# Altium PCB TPS40200BuckDesign.PcbDoc (part 1 of 2)
Units mil, origin at the board's own origin, x right, y up, seen from the top; angles counter-clockwise.
Board outline 3109.96 x 2273.62 mil, 2 copper layers (Top Layer, Bottom Layer), stack 62 mil thick; 37 components, 13 nets, 69 pads, 29 vias.
Unrouted connection lines stored in the file: 1.
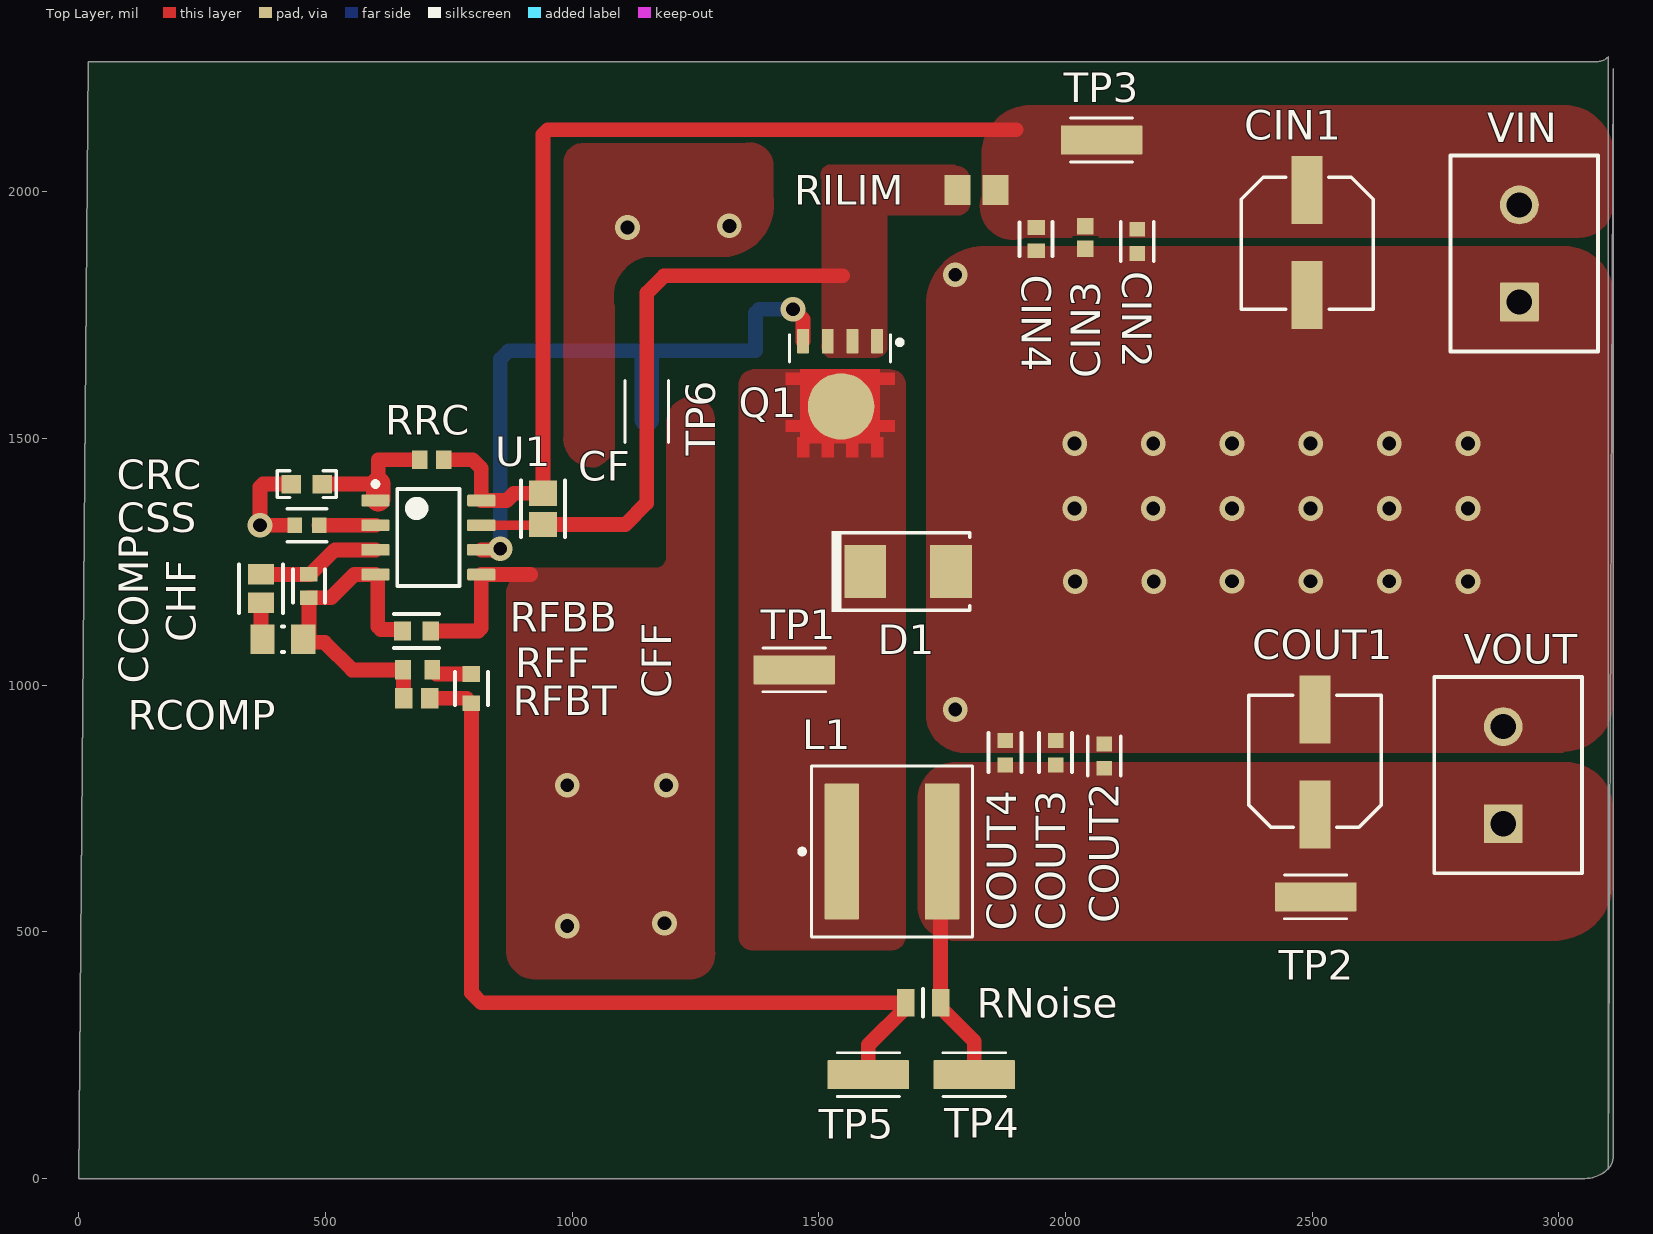
[diagram p0: Top Layer view]
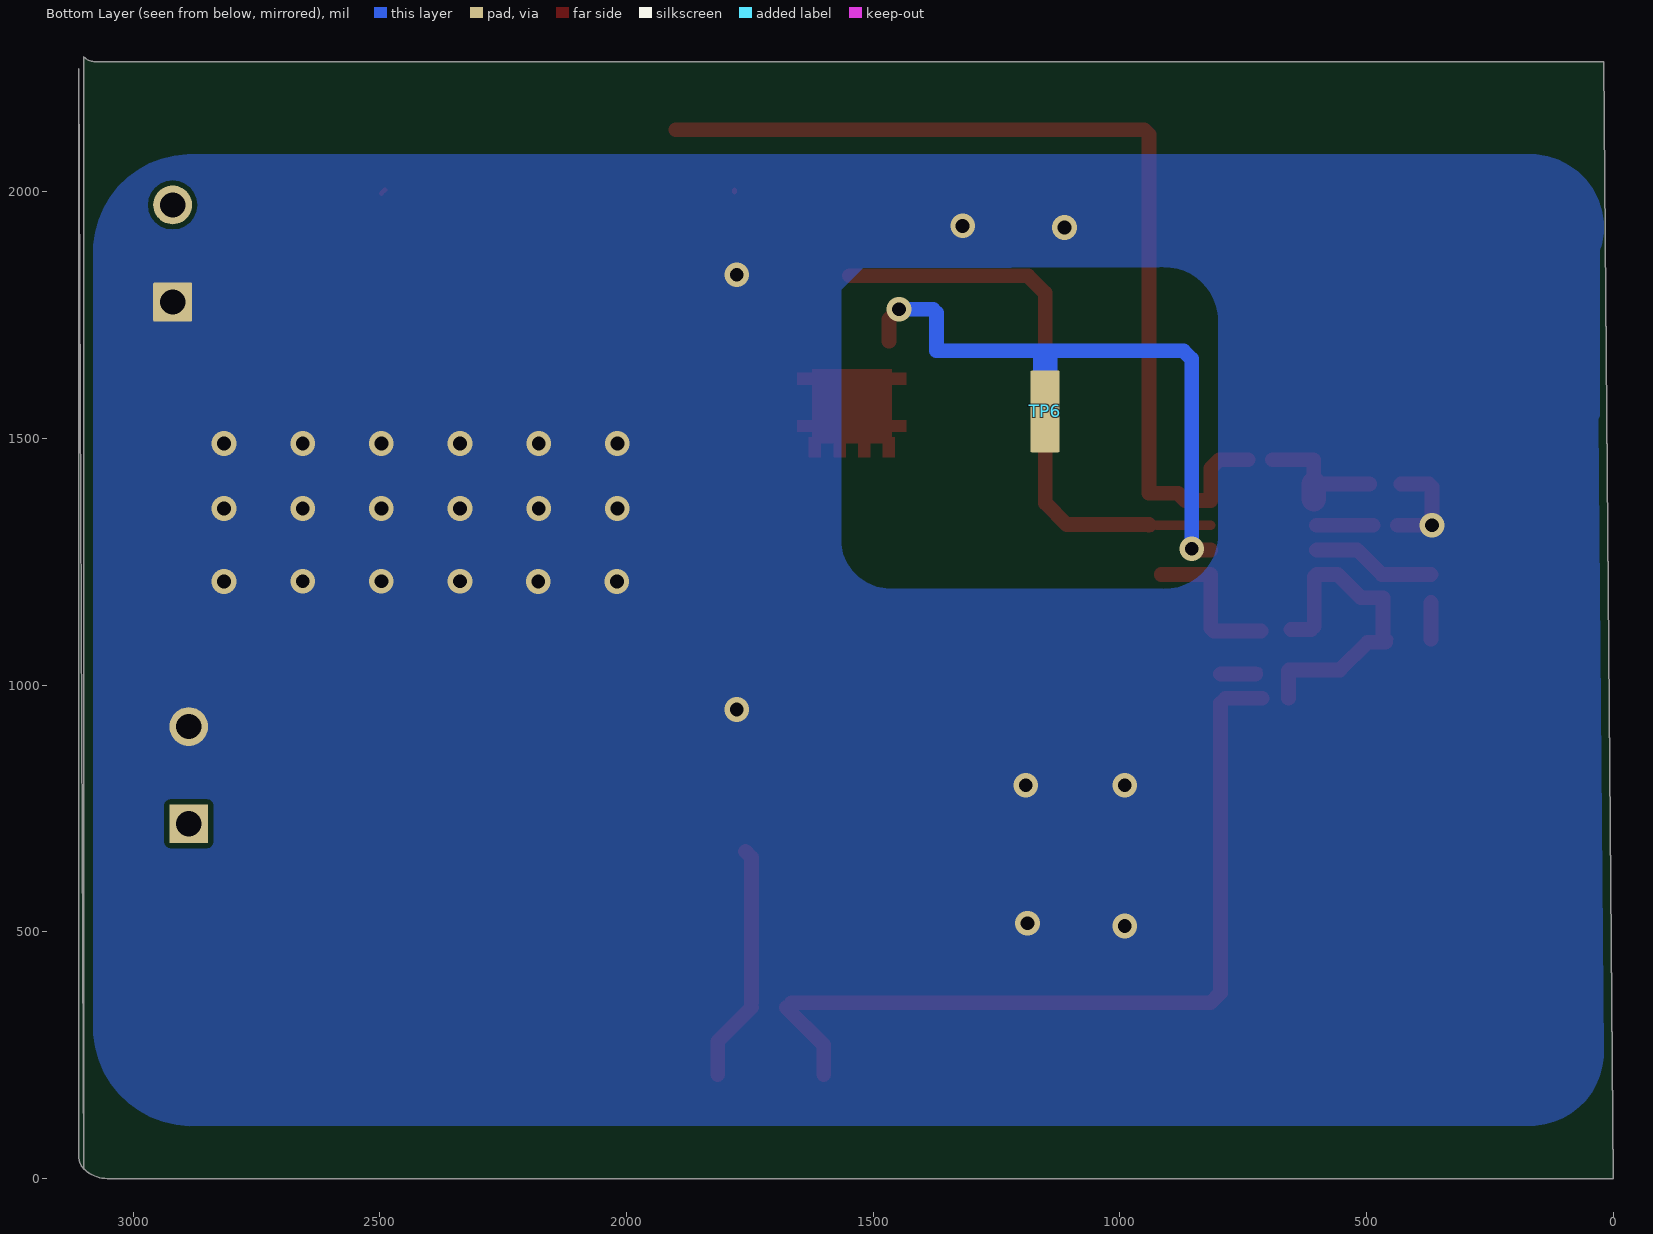
[diagram p1: Bottom Layer view, seen from below]

## Layer stack, top to bottom
Top Solder: solder mask 0.4, Solder Resist, Dk 3.5
Top Layer: signal copper 1.4
Dielectric1: core 59.2, FR-4 High Tg, Dk 4.8
Bottom Layer: signal copper 1.4
Bottom Solder: solder mask 0.4, Solder Resist, Dk 3.5

## Board outline
19.25,2263.78 3076.63,2263.78 ccw(c3076.63,2297.38) 3100.39,2273.62 3100.39,19.68 3110.24,2249.86 3110.24,43.45 cw(c3076.63,43.45) 3100.39,19.68 cw(c3052.87,67.21) 3052.87,0 0.27,0

## Design rules (kind name [scope] priority, off if disabled: settings)
AcuteAngle [All] p1: minimum=4.50000000000000E+0001 checktracksonly=FALSE
AssemblyTestPointUsage [All] p1: valid=2
BoardOutlineClearance BoardOutlineClearance_MountingHoles [OnCopper and InComponentClass('Mounting Holes')] p1: gap=39.37 ignorepadtopadclearanceinfootprint=FALSE
BoardOutlineClearance BoardOutlineClearance_Poly [OnCopper and IsPoly] p2: gap=25 ignorepadtopadclearanceinfootprint=FALSE
BoardOutlineClearance [OnCopper and Not InComponentClass('Logo') and not InComponentClass('FiducialMark') and not InRegion(1000,500,4000,800) and not InPoly] p3: gap=40 ignorepadtopadclearanceinfootprint=FALSE
Clearance Clearance_Keepouts [((IsTrack Or IsArc) And Not InPoly) And IsFree and IsKeepOut vs ((IsTrack Or IsArc) And Not InPoly) And IsFree and IsKeepOut] p1: gap=0 ignorepadtopadclearanceinfootprint=FALSE
Clearance Clearance_Poly [InPolygon] p2: gap=10 ignorepadtopadclearanceinfootprint=TRUE
Clearance Clearance_FiducialMark [IsKeepOut and InComponentClass('FiducialMark') vs IsPad and InComponentClass('FiducialMark')] p3: gap=0 ignorepadtopadclearanceinfootprint=FALSE
Clearance [All] p4: gap=7.87 ignorepadtopadclearanceinfootprint=TRUE
ComponentClearance ComponentClearance_MountingHoles_FiducialMarks [InComponentClass('Mounting Holes') vs InComponentClass('FiducialMark')] p1: gap=50 collisioncheckmode=3 verticalgap=10 showdistances=FALSE
ComponentClearance ComponentClearance_Shunt [InComponentClass('Header') vs InComponentClass('Shunt')] p2: gap=0 collisioncheckmode=3 verticalgap=0 showdistances=FALSE
ComponentClearance ComponentClearance_Logo [InComponentClass('Logo')] p3: gap=30 collisioncheckmode=3 verticalgap=10 showdistances=FALSE
ComponentClearance ComponentClearance_ScrewToNut [(HasFootprint('NY PMS 440 0025 PH')) vs (HasFootprint('Keystone_1902C'))] p4: gap=5 collisioncheckmode=3 verticalgap=10 showdistances=FALSE
ComponentClearance ComponentClearance_MountingHoles [InComponentClass('Mounting Holes')] p5: gap=100 collisioncheckmode=3 verticalgap=100000 showdistances=FALSE
ComponentClearance ComponentClearance_SmallPassives [HasFootprint('0201*') or HasFootprint('0402*') or HasFootprint('0508') or HasFootprint('0603*') or HasFootprint('0612') or HasFootprint('0805*') or HasFootprint('0815*') or HasFootprint('0830*') or HasFootprint('1206*') or HasFootprint('1210*') or HasFootprint('1808*') or HasFootprint('1812*') or HasFootprint('1825*') or HasFootprint('2010*') or HasFootprint('2220*') or HasFootprint('2225*') or HasFootprint('2512*') or HasFootprint('2728*') or HasFootprint('3518*') vs HasFootprint('0201*') or HasFootprint('0402*') or HasFootprint('0508') or HasFootprint('0603*') or HasFootprint('0612') or HasFootprint('0805*') or HasFootprint('0815*') or HasFootprint('0830*') or HasFootprint('1206*') or HasFootprint('1210*') or HasFootprint('1808*') or HasFootprint('1812*') or HasFootprint('1825*') or HasFootprint('2010*') or HasFootprint('2220*') or HasFootprint('2225*') or HasFootprint('2512*') or HasFootprint('2728*') or HasFootprint('3518*')] p6: gap=14.96 collisioncheckmode=3 verticalgap=10 showdistances=FALSE
ComponentClearance ComponentClearance_THtoSMT [IsThruComponent vs IsSMTComponent] p7: gap=30 collisioncheckmode=3 verticalgap=30 showdistances=FALSE
ComponentClearance ComponentClearance_THtoTH [IsThruComponent vs IsThruComponent] p8: gap=20 collisioncheckmode=3 verticalgap=30 showdistances=FALSE
ComponentClearance [All] p9: gap=20 collisioncheckmode=3 verticalgap=10 showdistances=FALSE
DiffPairsRouting [All] p1: maxlimit=100 minlimit=10 mostfreqgap=10 toplayer_minwidth=15 toplayer_maxwidth=15 toplayer_prefwidth=15 bottomlayer_minwidth=15 bottomlayer_maxwidth=15 bottomlayer_prefwidth=15 maxuncoupledlength=1000
FabricationTestPointUsage TestPointUsage [All] p1: valid=2 allowmultiple=FALSE
FabricationTestpoint Testpoint [All] p1: side=3 testpointundercomponent=TRUE minsize=40 maxsize=100 preferedsize=60 minholesize=0 maxholesize=40 preferedholesize=32 testpointgrid=1 allowsidetop=TRUE allowsidebottom=TRUE usegrid=TRUE gridtolerance=0.01
FanoutControl Fanout_LCC [IsLCC] p1: bgadir=Out bgaviamode=Centered fanoutstyle=Auto fanoutdirection=Alternating viagrid=1 // Fanout_LCC (Default Rule)
FanoutControl Fanout_BGA [IsBGA] p2: bgadir=Out bgaviamode=Centered fanoutstyle=Auto fanoutdirection=Alternating viagrid=1 // Fanout_BGA (Default Rule)
FanoutControl Fanout_Default [All] p4: bgadir=Out bgaviamode=Centered fanoutstyle=Auto fanoutdirection=Alternating viagrid=1 // Fanout_Default (Default Rule)
FanoutControl Fanout_Small [(CompPinCount < 5)] p5: bgadir=Out bgaviamode=Centered fanoutstyle=Auto fanoutdirection=OutThenIn viagrid=1 // Fanout_Small (Default Rule)
HoleSize [All] p1: absolutevalues=TRUE maxlimit=251 minlimit=7.87 maxpercent=80.000 minpercent=20.000
MinimumAnnularRing MinimumAnnularRing_ThermalPadVias [IsVia and InAnyComponent] p1: minimumring=5.91
MinimumAnnularRing [All] p2: minimumring=7.87
MinimumSolderMaskSliver MinimumSolderMaskSliver_Logo [InComponentClass('Logo') vs InComponentClass('Logo')] p1: minsoldermaskwidth=0.7
MinimumSolderMaskSliver [All] p2: minsoldermaskwidth=3.94
PlaneConnect [All] p1: planeconnectstyle=Direct reliefexpansion=10 reliefentries=4 reliefconductorwidth=10 reliefairgap=10
PolygonConnect [All] p1: connectstyle=Direct reliefconductorwidth=10 reliefentries=4 polygonreliefangle="90 Angle" airgapwidth=10
RoutingVias ThermalPadVias [IsVia and InAnyComponent] p1: holewidth=7.87 width=19.68 viastyle="Through Hole" minholewidth=7.87 minwidth=19.68 maxholewidth=12.99 maxwidth=23.62
RoutingVias [All] p2: holewidth=16 width=34 viastyle="Through Hole" minholewidth=7.87 minwidth=24 maxholewidth=40 maxwidth=65
SilkToBoardRegionClearance [Not ((IsComment or IsDesignator) And (Hide <> 'False')) and not InRegion(1000,500,4000,800)] p1:
SilkToSilkClearance SilkToSilkClearance_Pb-FreeLogo [(HasFootprint('Pb-Free_Overlay_Medium') OR HasFootprint('Pb-Free_Overlay_Small')) vs (HasFootprint('Pb-Free_Overlay_Medium') OR HasFootprint('Pb-Free_Overlay_Small'))] p1: silktosilkclearance=0
SilkToSilkClearance [All] p2: silktosilkclearance=3.94
SilkToSolderMaskClearance SilkToComponentPadClearance [(IsPad or IsFill or IsRegion) and InAnycomponent] p1: minsilkscreentomaskgap=5 clearancetoexposedcopper=TRUE
SilkToSolderMaskClearance "Silk to Solder Mask Opening" [All] p2: minsilkscreentomaskgap=3.94 clearancetoexposedcopper=FALSE
SolderMaskExpansion [All] p1: expansion=1.97 istentingtop=FALSE
UnRoutedNet [All] p1: checkbadconnections=TRUE
Width [All] p1: maxlimit=100 minlimit=6 preferedwidth=10 checkconnectedcopper=TRUE
14 further rules are at their usual default settings.

## Classes and differential pairs
component class TPS40200BuckDesign_BlankSheet: CCOMP CFF CHF CIN1 CIN2 CIN3 CIN4 COUT1 COUT2 COUT3 COUT4 CRC CSS D1 L1 Q1 RCOMP RFBB RFBT RFF RILIM RNoise RRC TP1 TP2 TP3 TP4 TP5 TP6 U1 VIN VOUT
component class PCB_Project_Hardware: ZZ1 ZZ2 ZZ3 ZZ4
component class AssemblyNote: ZZ1 ZZ2 ZZ3 ZZ4

## Components (designator, comment, footprint, x,y, rotation, side; value= is the part's Value field where it differs from the comment)
CCOMP "120pF" FP-CL21-IPC_C 369.49,1195.91 r90 top (schematic designator CCOMP1)
CF "470pF" FP-0805-L_2_01_0_2-W_1_25-IPC_B 940.9,1357.33 r270 top
CFF "390pF" FP-CC0603-DA-MFG 796.09,993.11 r90 top value="390 pF" (schematic designator CFF1)
CHF "1.4pF" FP-CBR06C-MFG 466.5,1200.86 r90 top value="1.4 pF" (schematic designator CHF1)
CIN1 "35SVPF22M" CAPSMT_62_F61 2489.19,1898.61 r270 top value=22uF
CIN2 "2.2uF" FP-GRM188-0_1-e0_2_0_5-IPC_C 2145.67,1899.61 r270 top
CIN3 "100nF" CAPC1608X90X40LL10T20 2040.41,1907.38 r90 top
CIN4 "1nF" FP-C0603C-CF-MFG 1940.6,1904.13 r270 top value="1,000 pF"
COUT1 "35SVPF22M" CAPSMT_62_F61 2506.94,843.52 r90 top value=22uF
COUT2 "2.2uF" FP-CL10-IPC_C 2078.74,856.3 r90 top
COUT3 "0.22uF" FP-GRM188-0_1-e0_2_0_5-IPC_C 1980.31,863.11 r90 top
COUT4 "1nF" FP-CL10-IPC_C 1877.95,863.11 r90 top
CRC "GCM1885C1H471JA16D" 0603 462.01,1407.75 r180 top value=470pF (schematic designator CRC1)
CSS "7.5nF" FP-GRM188-0_1-e0_2_0_5-IPC_C 462.6,1324.29 r180 top (schematic designator CSS1)
D1 "SL23-E3/52T" SMB 1681.27,1230.31 r0 top value=30V
L1 "XAL8080-223MED" FP-XAL8080-223MED_SMT_IND_8MM1_8MM6-MFG 1648.45,662.85 r0 top value=22uH
Q1 "DMP3028LPSQ-13" FP-DMP3028LPSQ-13_PowerDI5060-8-MFG 1543.28,1592.2 r180 top
RCOMP "390K" RESC0805(2012)_M 413.78,1092.99 r0 top value="390000.00 Ohm" (schematic designator RCOMP1)
RFBB "10k" FP-MCT0603-IPC_B 685.04,1109.72 r0 top (schematic designator RFBB1)
RFBT "120k" RESC1609X50X30ML10T20 685.04,973.43 r0 top (schematic designator RFBT1)
RFF "6k" RESC1608X55X25ML10T15 686.84,1030.98 r0 top (schematic designator RFF1)
RILIM "25m" RESC2013X50X40ML20T20 1819.88,2003.94 r180 top (schematic designator RILIM1)
RNoise "49.9" FP-MCU0805-MFG 1711.71,356.3 r180 top (schematic designator RNoise1)
RRC "62k" RESC1609X50X30NL10T20 715.55,1457.16 r180 top (schematic designator RRC1)
TP1 "" FP-RCWCTE_SMT_TP-MFG#1 1450.33,1030.98 r0 top
TP2 "" FP-RCWCTE_SMT_TP-MFG#1 2507.36,570.87 r0 top
TP3 "" FP-RCWCTE_SMT_TP-MFG#1 2073.4,2105.14 r0 top
TP4 "" FP-RCWCTE_SMT_TP-MFG#1 1815.29,210.63 r0 top
TP5 "" FP-RCWCTE_SMT_TP-MFG#1 1600.47,210.63 r0 top
TP6 "" FP-RCWCTE_SMT_TP-MFG#2 1151.57,1554.84 r90 top
U1 "TPS40200D" D0008A_N 708.66,1299.29 r0 top
VIN "" FP-691137710002_HDR2-MFG 2930.04,1875.08 r90 top (schematic designator VIN_terminal1)
VOUT "" FP-691137710002_HDR2-MFG 2897.38,817.6 r90 top (schematic designator VOUT_terminal1)
ZZ1 "This Assembly Note is for PCB labels only" AssemblyNoteLabel -1527.6,3554.14 r0 top
ZZ2 "These assemblies are ESD sensitive, ESD precautions shall be observed." AssemblyNote -1527.6,3445.26 r0 top
ZZ3 "These assemblies must be clean and free from flux and all contaminants. Use of no clean flux is not acceptable." AssemblyNote -1527.6,3356.7 r0 top
ZZ4 "These assemblies must comply with workmanship standards IPC-A-610 Class 2, unless otherwise specified." AssemblyNote -1527.6,3268.14 r0 top

## Footprints (in the part's own frame and the unit in brackets; to place one, negate y for a bottom-side part, rotate by r counter-clockwise, add the part's x,y. Pads: shape width x height; smd on the part's side, far side on the other; paste and mask are expansions set on the pad)
0603 [mm] "0603 from SM-752 data"
  rect 1x0.95 smd: 1(-0.8,0) 2(0.8,0)
  silkscreen extent -1.52,-0.69 1.52,0.69, body extent -0.87,-0.47 0.87,0.47, height 1
AssemblyNote [mil] "Assembly Note"
AssemblyNoteLabel [mil] "Assembly Note for PCB Labels"
CAPC1608X90X40LL10T20 [mm] "Chip Capacitor, 2-Leads, Body 1.70x0.90mm, IPC High Density"
  rect 0.85x0.85 smd: 1(-0.575,0) 2(0.575,0)
  body extent -0.85,-0.45 0.85,0.45, height 0.9
CAPSMT_62_F61 [mm] "6.3 x 5.8mm:  Chemi-Con F61"
  rect 3.5x1.6 smd: 1(-2.675,0.025) 2(2.725,0.025)
  silkscreen extent -3.34,-3.38 3.46,3.42, body extent -3.37,-3.38 3.46,3.43, height 6.1
D0008A_N [mm] "SOIC, 8-Leads, Body 5x4mm, Pitch 1.27mm, IPC Medium Density"
  rrect17% 1.45x0.6 smd: 1(-2.725,1.905) 2(-2.725,0.635) 3(-2.725,-0.635) 4(-2.725,-1.905) 5(2.725,-1.905) 6(2.725,-0.635) 7(2.725,0.635) 8(2.725,1.905)
  silkscreen extent -2.85,-2.5 1.6,2.88, body extent -3,-2.45 3,2.45, height 1.63
FP-0805-L_2_01_0_2-W_1_25-IPC_B [mil]
  rect 51.36x57.33 smd paste+0 mask+0: 1(-31.72,0) 2(31.72,0)
  silkscreen extent -57,-44 57,44, body extent -67,-39 67,39, height 10
FP-691137710002_HDR2-MFG [mm]
  rrect5% 2x2 hole 1.3 paste-1000 mask+0: 1(-2.5,0.25)
  round 2 hole 1.3 paste-1000 mask+0: 2(2.5,0.25)
  silkscreen extent -5.05,-3.8 5.05,3.8, body extent -5.15,-3.9 5.15,3.9, height 0.25
FP-C0603C-CF-MFG [mm]
  rect 0.75x0.9 smd paste+0 mask+0: 1(-0.6,0) 2(0.6,0)
  silkscreen extent -0.87,-0.85 0.88,0.85, body extent -1.2,-0.6 1.2,0.6, height 0.25
FP-CBR06C-MFG [mm]
  rect 0.75x0.9 smd paste+0 mask+0: 1(-0.6,0) 2(0.6,0)
  silkscreen extent -0.85,-0.82 0.85,0.82, body extent -1.2,-0.6 1.2,0.6, height 0.25
FP-CC0603-DA-MFG [mm]
  rect 0.8x0.9 smd paste+0 mask+0: 1(-0.75,0) 2(0.75,0)
  silkscreen extent -0.85,-0.85 0.85,0.85, body extent -1.35,-0.75 1.35,0.75, height 0.25
FP-CL10-IPC_C [mil]
  rect 29.85x31.97 smd paste+0 mask+0: 1(-24.68,0) 2(24.68,0)
  silkscreen extent -40,-33 40,33, body extent -44,-22 44,22, height 10
FP-CL21-IPC_C [mil]
  rect 41.52x53.39 smd paste+0 mask+0: 1(-28.57,0) 2(28.57,0)
  silkscreen extent -49,-44 49,44, body extent -53,-32 53,32, height 10
FP-DMP3028LPSQ-13_PowerDI5060-8-MFG [mm]
  rrect16% 0.61x1.27 smd paste+0 mask+0: 1(-1.905,-2.67) 2(-0.635,-2.67) 3(0.635,-2.67) 4(1.905,-2.67)
  round 3.426 smd paste+0 mask+0: 5-6-7-8(-0.051,0.692)
  Top Layer region: 2.05,-1.215 -2.05,-1.215 -2.05,-1.035 -2.805,-1.035 -2.805,-0.435 -2.05,-0.435 -2.05,1.39 -2.805,1.39 -2.805,1.99 -2.05,1.99 -2.05,2.285 -2.21,2.285 -2.21,3.305 -1.6,3.305 -1.6,2.595 -0.94,2.595 -0.94,3.305 -0.33,3.305 -0.33,2.595 0.33,2.595 0.33,3.305 0.94,3.305 0.94,2.595 1.6,2.595 1.6,3.305 2.21,3.305 2.21,2.285 2.05,2.285 2.05,1.99 2.805,1.99 2.805,1.39 2.05,1.39 2.05,-0.435 2.805,-0.435 2.805,-1.035 2.05,-1.035
  silkscreen extent -3.2,-3 2.6,-1.59, body extent -2.91,-3.4 2.91,3.4, height 0.25
FP-GRM188-0_1-e0_2_0_5-IPC_C [mil]
  rect 29.87x31.97 smd paste+0 mask+0: 1(-24.67,0) 2(24.67,0)
  silkscreen extent -40,-33 40,33, body extent -44,-22 44,22, height 10
FP-MCT0603-IPC_B [mil]
  rect 34x37.88 smd paste+0 mask+0: 1(-28.72,0) 2(28.72,0)
  silkscreen extent -46,-35 46,35, body extent -56,-29 56,29, height 10
FP-MCU0805-MFG [mm]
  rect 0.9x1.4 smd paste+0 mask+0: 1(-0.9,0) 2(0.9,0)
  silkscreen extent 0,-0.7 0,0.7, body extent -1.45,-0.8 1.45,0.8, height 0.25
FP-RCWCTE_SMT_TP-MFG#1 [mm]
  rrect7% 4.2x1.5 smd paste+0 mask+0: 1(0,0)
  silkscreen extent -1.6,-1.12 1.6,1.12, body extent -2.2,-0.9 2.2,0.9, height 0.25
FP-RCWCTE_SMT_TP-MFG#2 [mm]
  rrect7% 4.2x1.5 smd far side paste+0 mask+0: 1(0,0)
  silkscreen extent -1.6,-1.12 1.6,1.12, body extent -2.2,-0.9 2.2,0.9, height 0.25
FP-XAL8080-223MED_SMT_IND_8MM1_8MM6-MFG [mm]
  rrect6% 1.78x7 smd paste+0 mask+0: 1(-2.58,0) 2(2.58,0)
  silkscreen extent -4.75,-4.4 4.15,4.4, body extent -4.25,-4.5 4.25,4.5, height 0.25
RESC0805(2012)_M [mm] "Chip Resistor, Body 2.0x1.3mm, IPC Low Density"
  rect 1.25x1.5 smd: 1(-1.05,0) 2(1.05,0)
  silkscreen extent -0.05,-0.65 0.05,0.65, body extent -1.1,-0.67 1.1,0.67, height 0.7
RESC1608X55X25ML10T15 [mm] "Chip Resistor, 2-Leads, Body 1.60x0.80mm, IPC Low Density"
  rect 0.8x1 smd: 1(-0.75,0) 2(0.75,0)
  body extent -0.85,-0.45 0.85,0.45, height 0.55
RESC1609X50X30ML10T20 [mm] "Chip Resistor, 2-Leads, Body 1.55x0.85mm, IPC Low Density"
  rect 0.9x1.05 smd: 1(-0.675,0) 2(0.675,0)
  body extent -0.82,-0.48 0.82,0.48, height 0.5
RESC1609X50X30NL10T20 [mm] "Chip Resistor, 2-Leads, Body 1.55x0.85mm, IPC Medium Density"
  rect 0.8x0.95 smd: 1(-0.625,0) 2(0.625,0)
  body extent -0.82,-0.48 0.82,0.48, height 0.5
RESC2013X50X40ML20T20 [mm] "Chip Resistor, 2-Leads, Body 2.00x1.25mm, IPC Low Density"
  rect 1.35x1.55 smd: 1(-0.975,0) 2(0.975,0)
  body extent -1.1,-0.72 1.1,0.72, height 0.5
SMB [mil] "Molded Diode, 2-Leads, Body 5.4x3.6mm, IPC Medium Density, based on OnSemi component dimensions"
  rect 85x107.99 smd: 1(-87.01,0) 2(87.01,0)
  silkscreen extent -155,-82 125,82, body extent -106,-71 106,71, height 91

## Part data
CCOMP: library part CMP-13271-002834-1, "CL21 Series 0805 120pF 200V ±5% Tolerance C0G Multilayer Ceramic Chip Capacitor", Case Code (Imperial)=0805, Case Code (Metric)=2012, Dielectric=C0G, Max Operating Temperature=125°C, Min Operating Temperature=-55°C, Package Quantity=1, Tolerance=5%, Voltage Rating=200V, Capacitance=120pF, Case/Package=0805, Depth=1.25mm, Height=0.85mm, Lead Free="Lead Free", Length=2mm, Mount="Surface Mount", Packaging="Tape and Reel", Radiation Hardening=No, Thickness=0.037inch, Voltage Rating (DC)=200V, Width=0.049inch
CF: library part CMP-2007-04559-2, "General Purpose Ceramic Capacitor, 0805, 470pF, 5%, C0G, 30ppm/°C, 100V", Case Code (Imperial)=0805, Case Code (Metric)=2012, Dielectric=C0G, Insulation Resistance=100GR, Max Operating Temperature=125°C, Min Operating Temperature=-55°C, Package Quantity=1, Temperature Coefficient=30ppm/°C, Tolerance=5%, Voltage=100V, Capacitance=470pF, Case/Package=0805, Construction=Flat, Contact Plating=Tin, Depth=1.25mm, Dissipation Factor=2.5%, Height=0.94mm, Lead Free="Lead Free", Length=2.01mm, Mount="Surface Mount", Number of Pins=2, Packaging="Tape and Reel", Radiation Hardening=No, REACH SVHC="No SVHC", RoHS Compliant=Yes, Series=-, Size=0.94mm, Termination=SMD/SMT, Thickness=0.037inch, Voltage Rating=100V, Voltage Rating (DC)=100V, Width=1.25mm
CFF: library part CMP-03422-000674-1, "CAP CER 390PF 50V X7R 0603", Capacitance="390 pF", Manufacturer=YAGEO, Manufacturer Part Number=CC0603KRX7R9BB391, Package=CC0603-DA, Temperature="-55°C to +125°C", Temperature Characteristic=X7R, Temperature Coefficient=15%, Temperature Range High=+125°C, Temperature Range Low=-55°C, Tolerance=0.1, Voltage="50 V", Automotive=No, Category=Cap, ComponentLink2Description=Datasheet, ComponentLink2URL=http://www.yageo.com/documents/recent/UPY-GPHC_X7R_6.3V-to-50V_18.pdf, Device Class L1="Passive Components", Device Class L2=Capacitors, Device Class L3="Ceramic Capacitors", Digikey Description="CAP CER 390PF 50V X7R 0603", Footprint Url=http://www.yageo.com/exep/pages/download/literatures/UPY-C_GEN_24.pdf, Height=0.9mm, Lead Free=Yes, Material=Ceramic, Mouser Description="0603 390 pF 50 V ±10 % Tolerance X7R SMT Multilayer Ceramic Capacitor", Octopart=https://octopart.com/cc0603krx7r9bb391-yageo-39467837, RoHS=TRUE, Voltage Rating="50 V"
CHF: library part CMP-03020-006281-1, "CBR0603 1.4 pF C0G 30ppm/°C 0.1 pF 50 V", Capacitance="1.4 pF", Manufacturer=KEMET, Manufacturer Part Number=CBR06C149B5GAC, Package=CBR06C, Temperature="-55°C to +125°C", Temperature Characteristic=C0G, Temperature Coefficient=30ppm/°C, Temperature Range High=+125°C, Temperature Range Low=-55°C, Tolerance="0.1 pF", Voltage Rating="50 V", Automotive=No, Category=Cap, ComponentLink2Description=Datasheet, ComponentLink2URL=https://content.kemet.com/datasheets/KEM_C1030_CBR_SMD.pdf, Device Class L1="Passive Components", Device Class L2=Capacitors, Device Class L3="Ceramic Capacitors", Height=0.87mm, Ipc Land Pattern Name=CAPC16080X80, Lead Free=Yes, Material=Ceramic, Octopart=https://octopart.com/cbr06c149b5gac-kemet-84758707, RoHS=TRUE
CIN1 COUT1: library part CMP-0012134-2, "CAP, Aluminum Polymer, 22 uF, 35 V, +/- 20%, 0.035 ohm, F61 SMD", Manufacturer=Panasonic, Tolerance_%=20%, Value1="0.035 ohm", Value2=35V, ValueDisplayed=22uF, AEC Category=Q200, AEC Qualified=?, Cap_F=22µF, ComponentLink1Description="Datasheet link", ComponentLink1URL=http://industrial.panasonic.com/www-data/pdf/AAB8000/AAB8000CE1.pdf, CompType=Capacitor, ESR_ohm=35m, IRMS_A=2.6A, LatestRevisionDate=2017-03-09, MountType=SMT, PackageReference=F61, PartNumber=35SVPF22M, Polarized=Y, Publisher="Texas Instruments", RoHS=Y, Series=SVPF, SizeArea_mm2=43.56, SizeAreaWB_mm2=73.96, SizeX_mm=6.6, SizeY_mm=6.6, SizeZ_mm=5.8, TaMax_C=105°C, TaMin_C=-55°C, Technology="Aluminum Polymer", U/M=EA
  COUT1: VDC_V=35V
CIN2: library part CMP-2006-02548-2, "Chip Multilayer Ceramic Capacitors for General Purpose, 0603, 2.2uF, X5R, 15%, 10%, 35V", Case Code (Imperial)=0603, Case Code (Metric)=1608, Dielectric=X5R, Max Operating Temperature=85°C, Min Operating Temperature=-55°C, Package Quantity=4000, Tolerance=10%, Voltage=35V, Capacitance=2.2uF, Case/Package=0603, Depth=0.8mm, Height=0.8mm, Lead Free="Lead Free", Length=1.6mm, Material=Ceramic, Mount="Surface Mount", Packaging="Tape and Reel", REACH SVHC="No SVHC", Termination=SMD/SMT, Thickness=0.035inch, Voltage Rating=35V, Voltage Rating (DC)=35V, Weight=0.000222oz, Width=0.8mm
CIN3: library part CMP-1035-02594-2, "Chip Capacitor, 100 nF, - 20% to + 80%, 50 V, -30 to 85 degC, 0603 (1608 Metric), RoHS, Tape and Reel", Capacitance=0.1µF, Manufacturer=Yageo, Operating Temperature=-30°C~85°C, Package / Case=0603(1608Metric), Package Description="2-Pin Surface Mount Device, Body 1.6 x 0.8 mm", Package Reference=0603, Ratings=-, Standard Package=1, Temperature Coefficient=Y5V(F), Tolerance=-20%,+80%, Voltage - Rated=50V, Applications=GeneralPurpose, Category=Capacitors, Datasheet URL=https://datasheet.ciiva.com/17434/upy-gphc-y5v-6-3v-to-50v-5-17434523.pdf, Datasheet Version="Rev. 5, 07/2010", Family=CeramicCapacitors, Featured Product=CommodityMultilayerCeramicCapacitors–CCSeries, Features=-, Height - Seated (Max)=-, Kits=CC060300000000000-ND-MLCC0603SAMPLEKIT, Lead Spacing=-, Lead Style=-, Manufacturer URL=http://www.yageo.com/, Mounting Technology=SurfaceMount, Mounting Type=SurfaceMount,MLCC, Online Catalog=CCSeries, Other Names=311-1343-1, Packaging=CutTape(CT), Product Training Modules=MultilayerCeramicCapacitors, Series=CC, Size / Dimension="0.063\"Lx0.031\"W(1.60mmx0.80mm)", Thickness (Max)="0.035\"(0.90mm)"
CIN4: library part CMP-2006-03022-3, "CAP CER 1000PF 50V X7R 0603", Capacitance="1,000 pF", Manufacturer=KEMET, Manufacturer Part Number=C0603C102K5RACTU, Package=C0603C-CF, Temperature="-55°C to +125°C", Temperature Characteristic=X7R, Temperature Coefficient=30ppm/°C, Temperature Range High=+125°C, Temperature Range Low=-55°C, Tolerance=0.1, Voltage Rating="50 V", Automotive=Yes, Automotive Grade="Grade 1", Category=Cap, ComponentLink2Description=Datasheet, ComponentLink2URL=https://api.kemet.com/component-edge/download/datasheet/C0603C100J5GACAUTO.pdf, Device Class L1="Passive Components", Device Class L2=Capacitors, Device Class L3="Ceramic Capacitors", Digikey Description="CAP CER 1000PF 50V X7R 0603", Height=0.87mm, Lead Free=Yes, Material=Ceramic, Mouser Description="Capacitor; Ceramic; Cap; 1000pF; Tol 10%; SMT; Vol-Rtg 50V; X7R; Tape and Reel", Octopart=https://octopart.com/c0603c102k5ractu-kemet-144878, RoHS=TRUE
COUT2: library part CMP-13271-000789-1, "Cap Ceramic 2.2uF 10V Y5V -20/+80% Pad SMD 0603 +85°C T/R", Case Code (Imperial)=0603, Case Code (Metric)=1608, Dielectric=Y5V, Max Operating Temperature=85°C, Min Operating Temperature=-30°C, Tolerance=80%, Voltage Rating=10V, Capacitance=2.2uF, Case/Package=0603, Depth=0.8mm, Height=0.8mm, Length=1.6mm, Mount="Surface Mount", Packaging="Tape and Reel", Radiation Hardening=No, Thickness=0.035inch, Width=0.031inch
COUT3: library part CMP-06035-003691-1, "Chip Multilayer Ceramic Capacitors for General Purpose, 0603, 0.22uF, X7R, 15%, 10%, 50V", Capacitance=220nF, Case Code (Imperial)=0603, Case Code (Metric)=1608, Max Operating Temperature=125°C, Min Operating Temperature=-55°C, Tolerance=10%, Voltage Rating=50V, Case/Package=0603, Lead Free="Lead Free", Length=0.063inch, Mount="Surface Mount", Packaging="Tape and Reel", Thickness=0.035inch, Voltage Rating (DC)=50V, Width=0.031inch
COUT4: library part CMP-13271-004292-1, "Cap Ceramic 1nF 100V X7R ±10% Pad SMD 0603 +125°C T/R", Case/Package=0603, Dielectric=X7R, Max Operating Temperature=125°C, Min Operating Temperature=-55°C, Package Quantity=10000, Tolerance=10%, Voltage=100V, Capacitance=1nF, Construction=Flat, Depth=0.8mm, Height=0.8mm, Lead Free="Lead Free", Length=1.6mm, Mount="Surface Mount", Packaging="Tape and Reel", Radiation Hardening=No, RoHS Compliant=Yes, Series=CL, Thickness=0.035inch, Voltage Rating=100V, Voltage Rating (DC)=100V, Width=0.031inch
CRC: library part CMP-0007127-2, "CAP, CERM, 470 pF, 50 V, +/- 5%, C0G/NP0, AEC-Q200 Grade 1, 0603", Cap_Case=0603, Manufacturer=MuRata, Supplier Part Number 1=490-4965-1-ND, TempCo=C0G/NP0, Tolerance_%=5%, Value1=Unknown, Value2=50V, ValueDisplayed=470pF, AEC Category=Q200, AEC Grade=1, AEC Qualified=Y, Cap_F=470pF, ComponentLink1Description="Datasheet link", ComponentLink1URL=http://psearch.murata.com/capacitor/product/GCM1885C1H471JA16%23.pdf, CompType=Capacitor, LatestRevisionDate=2017-03-09, MountType=SMT, PackageReference=0603, PartNumber=GCM1885C1H471JA16D, Polarized=N, Published=2008-06-19, Publisher="Texas Instruments", RoHS=Y, SizeArea_mm2=1.28, SizeAreaWB_mm2=4.68, SizeX_mm=1.6, SizeY_mm=0.8, SizeZ_mm=1, Supplier 1=Digi-Key, Supplier 2=Mouser, Supplier Part Number 2=81-GCM1885C1H471J16D, TaMax_C=125°C, TaMin_C=-55°C, Technology=Ceramic, U/M=EA
CSS: library part CMP-06035-047924-1, "Chip Multilayer Ceramic Capacitors for General Purpose, 0603, 7500pF, C0G, 30ppm/°C, 5%, 50V", Dielectric=C0G, Tolerance=5%, Voltage Rating (DC)=50V, Capacitance=7.5nF, Length=1.6mm, Thickness=800um, Width=800um
D1: library part CMP-0028578-2, "Diode, Schottky, 30 V, 2 A, SMB", Manufacturer=Vishay-Semiconductor, Value1=2A, Value2=0.44V, AEC Category=Q101, AEC Qualified=?, ComponentLink1Description="Datasheet link", ComponentLink1URL=http://www.vishay.com/docs/88741/88741.pdf, CompType=Diode, Green_EU RoHS=Incomplete, Green_EU RoHS-2=Incomplete, Green_Lifecycle="Not Set", Green_REACh=Incomplete, Io_A=2A, MountType=SMT, PackageReference=SMB, PartNumber=SL23-E3/52T, RJC_CperW=17, RoHS=Y, SizeArea_mm2=21.336, SizeAreaWB_mm2=44.156, SizeX_mm=5.6, SizeY_mm=3.81, SizeZ_mm=2.6, TJmax_C=125°C, Type=Schottky, Vf_V=440mV, Vr_V=30V
L1: library part CMP-0001669-1, "22 µH Shielded Molded Inductor 7.6A 32.9mOhm Max Nonstandard", Manufacturer=Coilcraft, Mouser Part Number=994-XAL8080-223MED, Operating Temperature Range=to, Self Resonant Frequency=8.2MHz, Test Frequency=1MHz, Tolerance_%=20%, AEC Grade="Grade 1", AEC Qualified=Yes, ComponentLink1Description=Datasheet, ComponentLink1URL=https://www.coilcraft.com/getmedia/345e50d6-a804-4ecb-9a92-5185221faf3e/xal8080.pdf, datasheet=https://www.coilcraft.com/getmedia/345e50d6-a804-4ecb-9a92-5185221faf3e/xal8080.pdf, Datasheet Path=datasheets/Ind-XAL8080-223MED.pdf, DCR_ohm=32.9m, helpURL=https://upverter.com/upn/revision/e942f42e1132c320/, Ind_H=22µH, Irms=7.6A, Isat=6.4A, Lead Free=Yes, Material=Composite, Mouser Description="Power inductor, shielded, 20% tol, SMT, RoHS, halogen-free", PackageReference=SMT_IND_8MM1_8MM6, Part Number=XAL8080-223MED, PartNumber=XAL8080-223MED, RoHS=TRUE, Shrouded=true, SizeZ_mm=8mm, Supplier 2=Mouser, Supplier Part Number 2=994-XAL8080-223MED, TaMax_C=+125°C, TaMin_C=-40°C, Technology=Molded
Q1: library part CMP-0042040-1, "P-Channel 30 V 21A (Tc) 1.28W Surface Mount PowerDI5060-8", Digikey Part Number=DMP3028LPSQ-13DICT-ND, Drain To Source Breakdown Voltage=-30V, Input Capacitace At Vds="1372pF @ -15V", Manufacturer="Diodes Inc.", Mouser Part Number=621-DMP3028LPSQ-13, Operating Temperature Range="-55°C to +150°C", Power_W=1.28W, Pulse Drain Current=-70A, Typ Forward Diode Voltage=-0.7V, AEC Grade="Grade 0", AEC Qualified=Yes, ChMode=False, ComponentLink1Description=Datasheet, ComponentLink1URL=https://www.diodes.com/assets/Datasheets/DMP3028LPSQ.pdf, datasheet=https://www.diodes.com/assets/Datasheets/DMP3028LPSQ.pdf, Datasheet Path=datasheets/Trans-DMP3028LPSQ-13.pdf, Digikey Description="MOSFET P-CH 30V 21A PWRDI5060-8", helpURL=https://upverter.com/upn/revision/b40c729f0941e413/, IdsMax_A=-21A, Lead Free=Yes, Number Of Channels=1, Number Of P Channels=1, PackageReference=PowerDI5060-8, Part Number=DMP3028LPSQ-13, PartNumber=DMP3028LPSQ-13, QgTyp_nC="22nC @ -10V", Rdson45_ohm=18m, Reverse Recovery Charge=3.4nC, Reverse Recovery Time=10.8ns, RoHS=TRUE, Rthja Max=100°C/W, SizeZ_mm=1.1mm, Standoff Height=0mm, Threshold Vgs Max=-2.4V, Threshold Vgs Min=-1V, TJmax_C=+150°C, Turn Off Delay Time=32.8ns, Turn On Delay Time=4.8ns, VdsMax_V=-1.2V, Vgs_V=20V
RCOMP: library part CMP-1013-00136-1, "390K 0.125W 5% 0805 (2012 Metric)  SMD", Case-EIA=0805, Case-Metric=2012, Power="0.125 W", Tolerance="5 %", Technology=SMT
RFBB: library part CMP-02407-000530-1, "RES SMD 100 OHM 1% 1/8W 0603", Case Code (Imperial)=0603, Case Code (Metric)=1608, Max Operating Temperature=155°C, Max Power Dissipation=125mW, Min Operating Temperature=-55°C, Package Quantity=1, Resistance=10kR, Temperature Coefficient=25ppm/°C, Tolerance=0.1%, Voltage Rating=75V, Case/Package=0603, Composition="Thin Film", Contact Plating=Tin, Depth=0.85mm, Features="Automotive AEC-Q200", Height=0.45mm, Lead Free="Lead Free", Length=1.55mm, Military Standard=Not, Number of Terminations=2, Packaging="Tape and Reel", Power Rating=125mW, Radiation Hardening=No, REACH SVHC="No SVHC", Voltage Rating (DC)=75V, Width=0.033inch
RFBT: library part CMP-2000-03869-1, Manufacturer="Vishay Dale", Part Number=CRCW0603120KJNEA
RFF: library part CMP-2000-04287-1, Manufacturer=Yageo, Part Number=RC0603JR-076K2L
RILIM: library part CMP-2001-03177-1, Manufacturer=Susumu, Part Number=RL1220T-R025-J
RNoise: library part CMP-02407-007468-1, "RES 1.05K OHM 0.5% 1/5W 0805", Case Code (Imperial)=0805, Case Code (Metric)=2012, Max Operating Temperature=155°C, Max Power Dissipation=200mW, Min Operating Temperature=-55°C, Package Quantity=1000, Resistance=49.9R, Temperature Coefficient=25ppm/°C, Tolerance=0.1%, Voltage Rating=150V, Case/Package=0805, Composition="Thin Film", Features="Automotive AEC-Q200", Height=0.024inch, Length=0.079inch, Number of Terminations=2, Packaging="Tape and Reel", Power Rating=200mW, Weight=0.000162oz, Width=0.049inch
RRC: library part CMP-2000-03515-1, Manufacturer="Vishay Dale", Part Number=CRCW060362K0FKEA
TP1 TP2 TP3 TP4 TP5 TP6: library part CMP-0031226-1, "PC Test Point Plating Surface Mount Mounting Type", Current_A=2A, Digikey Part Number=2019-RCWCTECT-ND, Manufacturer="KOA Speer", Mouser Part Number=660-RCWCTE, Operating Temperature Range="-55°C to +125°C", Part Number=RCWCTE, AEC Qualified=No, ComponentLink1Description=Datasheet, ComponentLink1URL=https://www.koaspeer.com/pdfs/RC.pdf, Conn Gender=Female, ContactFinish=Tin,Copper, datasheet=https://www.koaspeer.com/pdfs/RC.pdf, Datasheet Path=datasheets/Conn-RCWCTE.pdf, Digikey Description="PC TEST POINT", helpURL=https://upverter.com/upn/revision/0d6092c830e4cfc2/, Is Female=yes, Lead Free=Yes, Mouser Description="Current Sense Resistors - SMD CHIP CHECKER HT=2.0 1206", PackageReference=SMT_TP, PartNumber=RCWCTE, PinCount=1, RoHS=TRUE, SizeZ_mm=2mm, Supplier 1=Digikey, Supplier 2=Mouser, Supplier Part Number 1=2019-RCWCTECT-ND, Supplier Part Number 2=660-RCWCTE
U1: library part CMP-0346-00066-2, "Wide Input Non-Synchronous Buck DC / DC Controller, 90 % Duty Cycle, 4.5 to 52 V, -40 to 85 degC, 8-pin SOIC (D), Green (RoHS & no Sb/Br)", Manufacturer="Texas Instruments", Switching Frequency(Max)(kHz)=500, Code_JEDEC=MS-012AA, ComponentLink1Description=Datasheet, ComponentLink1URL=http://www.ti.com/general/docs/lit/getliterature.tsp?genericPartNumber=TPS40200&fileType=pdf, ComponentLink2Description="Package Specification", ComponentLink2URL=http://www.ti.com/litv/pdf/msoi002j, DatasheetVersion=SLUS659F, Duty Cycle(Max)(%)=90, Eco-Plan="Green (RoHS & no Sb/Br)", Iout2(A)=3, Iout(Max)(A)=3, Mounting Technology="Surface Mount", PackageDescription="8-Pin Plastic Small Outline Integrated Circuit, 4.9 x 3.9 mm, Pitch 1.27 mm Pitch", PackageReference=D0008A, PackageVersion="revM, Jun-2011", PartNumber=TPS40200D, Regulated Outputs(#)=1, SubFamily="Step-Down Controller", Topology=Buck, Vin(Max)(V)=52, Vin(Min)(V)=4.5, Vout(Max)(V)=46, Vout(Min)(V)=0.7
VIN VOUT: library part CMP-0087503-1, "TERM BLK 2POS SIDE ENTRY 5MM PCB", Current_A=16A, Manufacturer="Würth Elektronik", PartNumber=691137710002, Voltage_V=300V, ComponentLink1Description=Datasheet, ComponentLink1URL=https://katalog.we-online.com/em/datasheet/691137710002.pdf, ContactFinish=Tin,Nickel, PackageReference=HDR2, PinCount=2, RoHS=TRUE, Row_Count=1, Symbol Name=SYM-691137710002
ZZ1: library part CMP-0003616-3, ClassName=AssemblyNote, CompType=AssemblyNote, Key=AssemblyNoteLabel, LatestRevisionDate=2017-03-09, Publisher="Texas Instruments"
ZZ2: library part CMP-0077236-1, ClassName=AssemblyNote, CompType=AssemblyNote, Key=AssemblyNote, LatestRevisionDate=2017-08-10, Publisher="Texas Instruments"
ZZ3: library part CMP-0077237-1, ClassName=AssemblyNote, CompType=AssemblyNote, Key=AssemblyNote, LatestRevisionDate=2017-08-10, Publisher="Texas Instruments"
ZZ4: library part CMP-0077238-1, ClassName=AssemblyNote, CompType=AssemblyNote, Key=AssemblyNote, LatestRevisionDate=2017-08-10, Publisher="Texas Instruments"

## Via types
v1: diameter 50, hole 28, Top Layer to Bottom Layer, 29 vias

## Nets (pads, with @x,y where several pads share a name; then routed paths per layer and width w, separated by ;. In a path a pad name is that pad's centre, name@x,y a point inside that pad or via, vN(x,y) a via of type N, cw(c..) or ccw(c..) an arc to the next point about the centre after c; other vN are vias at no path point)
"GDRV Wire": Q1.4 TP6.1 U1.6 | length 1302
  Top Layer w30: U1.6 v1@852.45,1274.29 ; v1(1447.71,1762.18) 1468.28,1741.61 Q1.4
  Bottom Layer w10: 1372.09,1755.04 1379.23,1762.18
  Bottom Layer w30: v1@854.33,1272.4 v1(854.33,1276.5) 854.33,1660.91 871.38,1677.96 1151.58,1677.96 1372.09,1677.96 1372.09,1755.04 ; 1379.23,1762.18 v1(1447.71,1762.18)
  Bottom Layer w50: TP6.1@1151.57,1537.79 1151.57,1660.91
GND: CIN1.2 CIN2.2 CIN3.1 CIN4.2 COUT1.2 COUT2.2 COUT3.2 COUT4.2 CRC.2 CSS.2 D1.2 RFBB.2 U1.5 VIN.1 VOUT.2 | length 529.1
  Top Layer w10: 367.52,1401.89 373.38,1407.75 ; RFBB.2 RFBB.2@713.76,1111.66 ; 810.09,1109.72 815.94,1115.58 ; 916.09,1224.29 916.29,1224.48
  Top Layer w30: 367.52,1401.89 v1(367.52,1324.29) CSS.2 ; 373.38,1407.75 CRC.2 ; RFBB.2 810.09,1109.72 ; 815.94,1115.58 U1.5 916.09,1224.29
  other v1: 990.16,511.81 1187.53,517.3 990.16,797.24 1190.94,797.24 1776.57,950.79 2019.66,1210.31 2179.13,1210.31 2337.7,1210.63 2497.18,1210.63 2656.65,1210.63 2816.13,1210.31 2018.76,1358.27 2178.23,1358.27 2337.7,1358.27 2497.18,1358.27 2656.65,1358.27 2816.13,1358.27 2018.76,1490.03 2178.23,1490.03 2337.7,1490.03 2497.18,1490.03 2656.65,1490.03 2816.13,1490.03 1776.57,1831.93 1112.2,1927.76 1318.9,1931.1
"ISNS Wire": CF.2 Q1.1 Q1.2 Q1.3 RILIM.2 U1.7 | length 1193.6
  Top Layer w10: CF.2@924.97,1326.04 CF.2@935.04,1315.97 ; RILIM.2@1781.5,2000 RILIM.2
  Top Layer w20: U1.7 CF.2@924.97,1324.29
  Top Layer w30: CF.2@941.77,1324.73 CF.2 1107.62,1325.6 1151.57,1369.56 1151.57,1794.72 1186.61,1829.76 1548.21,1829.76
NetCCOMP1_1: CCOMP.1 RCOMP.1 | length 74.3
  Top Layer w30: RCOMP.1@369.49,1092.99 CCOMP.1
NetCCOMP1_2: CCOMP.2 CHF.2 U1.3 | length 252.5
  Top Layer w10: CHF.2 CHF.2@469.46,1224.48
  Top Layer w30: CCOMP.2 CHF.2 ; CHF.2@469.46,1224.48 519.26,1274.29 U1.3
NetCFF1_1: CFF.1 RFBT.2 RNoise.2 TP5.1 | length 1744.1
  Top Layer w10: CFF.1@786.24,973.43 CFF.1 ; TP5.1@1594.56,216.54 TP5.1 ; RNoise.2@1666.43,356.3 RNoise.2@1676.27,346.46
  Top Layer w30: RFBT.2 CFF.1@786.24,973.43 ; CFF.1 796.09,376.16 815.94,356.3 RNoise.2@1666.43,356.3 ; TP5.1 1600.47,270.65 RNoise.2@1676.27,346.46
NetCFF1_2: CFF.2 RFF.2 | length 83.2
  Top Layer w10: RFF.2 RFF.2@724.7,1022.64
  Top Layer w30: RFF.2@724.7,1022.64 CFF.2
NetCHF1_1: CHF.1 RCOMP.2 RFBB.1 RFBT.1 RFF.1 U1.4 | length 690.7
  Top Layer w10: RCOMP.2 RCOMP.2@466.5,1104.37 ; U1.4 U1.4@606.3,1219.37 ; 606.3,1118.53 612.16,1112.67 ; RFBB.1@653.37,1112.67 RFBB.1 ; RFF.1 RFF.1@658.46,1029.82
  Top Layer w20: RCOMP.2 RCOMP.2@461,1087.1
  Top Layer w30: RCOMP.2@461,1087.1 498.01,1087.1 554.13,1030.98 RFF.1 ; RCOMP.2@466.5,1104.37 CHF.1 511.3,1177.24 558.35,1224.29 U1.4 ; 606.3,1118.53 U1.4@606.3,1219.37 ; 612.16,1112.67 RFBB.1@653.37,1112.67 ; RFBT.1 RFF.1@658.46,1029.82
NetCRC1_1: CRC.1 RRC.2 U1.1 | length 292.9
  Top Layer w10: 601.38,1451.3 607.24,1457.16 ; 607.04,1407.95 607.24,1407.75
  Top Layer w30: CRC.1 607.24,1407.75 607.24,1457.16 RRC.2 ; U1.1 604.05,1374.29 U1.1@607.24,1377.48
  Top Layer w50: U1.1@607.24,1377.48 607.24,1407.75
NetCSS1_1: CSS.1 U1.2 | length 114.1
  Top Layer w30: CSS.1 U1.2
"Switch Node": D1.1 L1.1 Q1.5-6-7-8 TP1.1 | length 10.8
  Top Layer w70: Q1.5-6-7-8 Q1.5-6-7-8@1552.89,1557.34
VIN: CF.1 CIN1.1 CIN2.1 CIN3.2 CIN4.1 RILIM.1 RRC.1 TP3.1 U1.8 VIN.2 | length 1979.1
  Top Layer w10: CIN1.1 CIN1.1@2497.06,1997.03
  Top Layer w30: RRC.1 798.37,1457.16 815.94,1439.59 U1.8 867.57,1374.29 882.34,1389.05 CF.1 940.9,2116.14 950.74,2125.98 1899.61,2125.98
VOUT: COUT1.1 COUT2.1 COUT3.1 COUT4.1 L1.2 RNoise.1 TP2.1 TP4.1 VOUT.1 | length 485.3
  Top Layer w10: RNoise.1@1747.14,346.46 RNoise.1
  Top Layer w30: RNoise.1@1747.14,346.46 1815.29,278.3 TP4.1 ; RNoise.1 1747.14,651.25 L1.2@1758.75,662.85

## Polygon pours and split planes (outlines as drawn)
GND on Top Layer "TOP_LAYER_GND_P018" (solid, pour order 18): 982.66,1504.48 ccw(c1042.33,1501.18) 1049.52,1441.86 ccw(c1022.09,1505.65) 1086.11,1478.75 1086.11,1768.46 cw(c1165.76,1787.46) 1151.57,1868.11 1312.19,1868.11 ccw(c1302.35,1974.28) 1407.48,1992.08 1407.48,2058.93 ccw(c1360.17,2052.28) 1348.58,2098.63 1022.36,2098.63 ccw(c1022.36,2058.93) 982.66,2058.93
"ISNS Wire" on Top Layer "TOP_LAYER_ISNS_WIRE_P015" (solid, pour order 15): 1618.28,1663.39 1618.28,1664.68 ccw(c1618.28,1685.26) 1638.85,1685.26 1638.85,1952.76 1783.63,1952.76 ccw(c1783.64,1975.39) 1806.27,1975.39 1806.27,2023.62 ccw(c1776.57,2023.62) 1776.57,2053.32 1776.57,2055.12 1518.28,2055.12 ccw(c1527.46,2033.58) 1506.27,2023.62 1506.27,1694.96 ccw(c1531.5,1687.74) 1518.28,1665.08 1518.28,1663.39
GND on Top Layer "TOP_LAYER_GND_P021" (solid, pour order 21): 1245.33,403.54 1245.33,404.64 ccw(c1240.06,454.13) 1289.14,462.37 1289.14,1537.48 ccw(c1241.79,1537.48) 1241.78,1584.83 ccw(c1243.93,1532.37) 1191.65,1537.28 1190.94,1537.28 1190.94,1259.68 cw(c1170.19,1258.58) 1171.26,1237.83 930.47,1237.83 ccw(c923.63,1180.34) 866.14,1187.15 866.14,462.37 ccw(c924.97,462.37) 924.97,403.54
"Switch Node" on Top Layer "TOP_LAYER_SWITCH_NODE_P017" (solid, pour order 17): 1647.59,462.6 ccw(c1647.59,491.33) 1676.27,489.63 1676.27,1609.33 ccw(c1645.57,1609.33) 1645.56,1640.03 1369.01,1640.03 ccw(c1369.01,1606.65) 1337.97,1594.38 1337.97,462.6
VOUT on Top Layer "TOP_LAYER_VOUT_P009" (solid, pour order 9): 3110.24,602.36 cw(c2991.14,601.38) 2992.13,482.28 1767.68,482.28 1767.68,484.29 cw(c1767.67,551.18) 1700.79,551.18 1700.79,768.7 cw(c1775.52,768.7) 1776.57,843.43 3011.81,843.43 3014.84,843.43 cw(c3014.84,748.03) 3110.24,748.03
GND on Top Layer "TOP_LAYER_GND_P007" (solid, pour order 7): 1718.38,939.5 ccw(c1794.77,939.5) 1794.78,863.11 1801.18,863.11 3011.81,863.11 3011.81,866.14 ccw(c3011.81,964.57) 3110.24,964.57 3110.24,1791.34 3110.14,1791.34 ccw(c3011.81,1791.34) 3011.81,1889.66 1834.3,1889.66 ccw(c1834.3,1773.74) 1718.38,1773.74
VIN on Top Layer "TOP_LAYER_VIN_P008" (solid, pour order 8): 3110.24,1992.08 3110.24,1976.28 cw(c3041.34,1976.28) 3041.34,1907.38 1918.65,1907.38 cw(c1894.39,1970.2) 1830.71,1992.08 1830.71,2076.77 cw(c1929.13,2076.77) 1929.13,2175.2 3011.81,2175.2 cw(c3011.81,2076.77) 3110.24,2076.77
GND on Bottom Layer "Bottom Layer-GND" (solid, pour order 39): 19.69,256.9 ccw(c168.35,255.67) 168.36,107 2872.91,107 ccw(c2881.43,306.1) 3080.71,306.1 3080.71,1878.94 ccw(c2883.77,1878.94) 2877.78,2075.79 167.32,2075.79 ccw(c167.32,1928.15) 27.04,1882.15 27.04,1544.69 30.24,1539.29

## Keep-outs
Keep-Out Layer:
  text ".Layer_Name" at -1135.6,-1242.35 h60

## Other copper
Top Layer:
  text ".Layer_Name" at -1135.6,-1242.35 h60
Bottom Layer:
  pour cut-out: 1564.2,1813.67 1532.23,1845.86 911.18,1847.12 ccw(c910.96,1737.95) 801.85,1741.75 801.85,1303.94 ccw(c910.07,1303.94) 918,1196.01 1464.2,1196.01 ccw(c1464.21,1296.01) 1564.2,1296.01
  text ".Layer_Name" at -1135.6,-1242.35 h60

## Silkscreen, mask and mechanical layers (free items; w line width, h text height)
Top Overlay:
  text ".Layer_Name" at -1135.6,-1242.35 h60
Bottom Overlay:
  text ".Layer_Name" at -1135.6,-1242.35 h60
Top Paste:
  text ".Layer_Name" at -1135.6,-1242.35 h60
Bottom Paste:
  text ".Layer_Name" at -1135.6,-1242.35 h60
Top Solder:
  text ".Layer_Name" at -1135.6,-1242.35 h60
  text ".Layer_Name" at -1135.6,-1242.35 h60
Bottom Solder:
  text ".Layer_Name" at -1135.6,-1242.35 h60
Drill Guide:
  text ".Layer_Name" at -1135.6,-1242.35 h60
M1 Board Outline:
  pour cut-out: 2517.25,1878.21 2917.06,1875.08 2913.92,1878.21
  pour cut-out: 2517.25,1878.21 2917.06,1875.08 2913.92,1878.21
  lines w10: -1712.6,-383.86 -221.83,-383.86 1891.36,-383.86 3237.4,-383.86 3237.4,3066.14 -1712.6,3066.14
  text ".Layer_Name" at -1135.6,-1242.35 h60
M2 Board Dimensions:
  rectangle: -1712.6,-658.86 -1587.6,-533.86
  rectangle: -1587.6,-783.86 -1212.6,-658.86
  lines w7: -1712.6,-658.86 -712.6,-658.86 ; -1587.6,-783.86 -1587.6,-533.86 ; -1462.6,-783.86 -1462.6,-533.86 ; -1212.6,-783.86 -1212.6,-533.86 ; -962.6,-783.86 -962.6,-533.86 ; -1712.6,-783.86 -712.6,-783.86 -712.6,-533.86 -1712.6,-533.86 -1712.6,-783.86
  text ".Layer_Name" at -1135.6,-1242.35 h60
M3 3D STEP Top:
  text ".Layer_Name" at -1135.6,-1242.35 h60
M4 3D STEP Bottom:
  text ".Layer_Name" at -1135.6,-1242.35 h60
M5 Assembly Top:
  lines w10: -2004.6,-1314.03 4595.4,-1314.03 ; -2004.6,-1110.69 4597.4,-1110.69 ; -2004.6,-907.36 -2004.6,-1517.36 2000.4,-1517.36 4597.4,-1517.36 4597.4,-907.36 -2004.1,-907.36 -2004.1,-1517.36 -428.6,-1517.36 ; 460.4,-1517.36 460.4,-907.36 ; 1727.4,-1110.69 1727.4,-907.36 ; 2567.4,-1110.69 2567.4,-907.36 ; 3189.4,-1523.86 3189.4,-1321.03
  text "COMPONENTS MARKED 'DNP' SHOULD NOT BE POPULATED." at -559.1,-702.36 h60
  text "ASSEMBLY VARIANT:" at -559.6,-817.86 h60
  text ".VariantName" at 476.4,-817.86 h60
  text "PCB VIEWED FROM TOP SIDE" at -1941.1,-1039.53 h60
  text "BOARD #:" at 535.4,-1039.53 h60
  text ".PRJ_Number" at 1080.9,-1039.53 h60
  text "REV:" at 1925.4,-1039.53 h60
  text ".PCB_Rev" at 2216.9,-1039.53 h60
  text "SVN REV:" at 2763.4,-1039.53 h60
  text ".VersionControl_RevNumber" at 3269.4,-1039.53 h60
  text "TID #:" at 535.4,-1242.86 h60
  text ".TID" at 1080.9,-1242.86 h60
  text "PLOT NAME =" at -1941.1,-1448.19 h60
  text ".plot_File_Name" at -1135.6,-1448.19 h60
  text "GENERATED    :" at 537.4,-1448.19 h60
  text ".Print_Date" at 1406.9,-1448.19 h60
  text ".Print_Time" at 2135.9,-1448.19 h60
  text "TEXAS INSTRUMENTS" at 3400.4,-1448.19 h60
M6 Assembly Bottom:
  lines w10: -2005.1,-1111.19 4596.9,-1111.19 ; -2003.1,-1314.53 4596.9,-1314.53 ; -597.1,-1524.36 -597.1,-1321.53 ; 24.9,-1111.19 24.9,-907.86 ; 864.9,-1111.19 864.9,-907.86 ; 2131.9,-1517.86 2131.9,-907.86 ; 3020.9,-1517.86 4596.4,-1517.86 4596.4,-907.86 -2005.1,-907.86 -2005.1,-1517.86 591.9,-1517.86 4596.9,-1517.86 4596.9,-907.86
  text "COMPONENTS MARKED 'DNP' SHOULD NOT BE POPULATED." at 4389.4,-701.86 h60
  text ".VariantName" at 3345.4,-817.86 h60
  text "ASSEMBLY VARIANT:" at 4384.4,-817.86 h60
  text ".VersionControl_RevNumber" at -677.1,-1040.03 h60
  text "SVN REV:" at -171.1,-1040.03 h60
  text ".PCB_Rev" at 375.4,-1040.03 h60
  text "REV:" at 666.9,-1040.03 h60
  text ".PRJ_Number" at 1511.4,-1040.03 h60
  text "BOARD #:" at 2056.9,-1040.03 h60
  text "PCB VIEWED FROM BOTTOM SIDE" at 4533.4,-1040.03 h60
  text ".TID" at 1511.4,-1243.36 h60
  text "TID #:" at 2056.9,-1243.36 h60
  text "TEXAS INSTRUMENTS" at -808.1,-1448.69 h60
  text ".Print_Time" at 456.4,-1448.69 h60
  text ".Print_Date" at 1185.4,-1448.69 h60
  text "GENERATED    :" at 2054.9,-1448.69 h60
  text ".plot_File_Name" at 3727.9,-1448.69 h60
  text "PLOT NAME =" at 4533.4,-1448.69 h60
M9 Title Sheet:
  drawing of 57 lines, arcs and shapes, not listed
  text "1" at -972.76,7652.64 h70
  text "2" at 1522.9,7652.64 h70
  text "3" at 4012.24,7652.64 h70
  text "4" at 6518.91,7652.64 h70
  text "5" at 9017.9,7652.64 h70
  text "6" at 11522.9,7652.64 h70
  text "A" at -2129.1,6509.64 h70
  text "A" at 12670.9,6509.64 h70
  text "B" at -2129.1,4129.64 h70
  text "B" at 12670.9,4129.64 h70
  text "C" at -2129.1,1754.64 h70
  text "C" at 12670.9,1754.64 h70
  text "PROJECT TITLE:" at 9630.9,-106.36 h45
  text ".PRJ_Title" at 9680.9,-239.69 h70
  text "DESIGNED FOR:" at 9630.9,-407.36 h45
  text ".PRJ_Customer" at 9680.9,-547.36 h70
  text "D" at -2129.1,-615.36 h70
  text "D" at 12670.9,-615.36 h70
  text "FILE NAME:" at 9630.9,-707.36 h45
  text ".PCB_File_Name_No_Path" at 9680.9,-827.36 h70
  text "Texas Instruments (TI) and/or its licensors do not warrant the accuracy or completeness of this specification" at 4661.4,-989.2 h45
  text "ENGINEER:" at 9630.9,-997.36 h45
  text "LAYOUT BY:" at 11135.9,-997.36 h45
  text "or any information contained therein. TI and/or its licensors do not warrant that this design will meet" at 4616.42,-1101.86 h45
  text ".PRJ_Engineer" at 9680.9,-1152.35 h70
  text ".PCB_Layout" at 11186.4,-1152.35 h70
  text "the specifications, will be suitable for your application or fit for any particular purpose, or will operate in" at 4616.42,-1214.53 h45
  text ".Layer_Name" at -1135.6,-1242.35 h60
  text "ALTIUM DESIGNER VERSION:" at 11135.9,-1307.36 h45
  text "an implementation. TI and/or its licensors do not warrant that the design is production worthy. You should" at 4616.42,-1327.19 h45
  text "completely validate and test your design implementation to confirm the system functionality for your application." at 4661.4,-1439.86 h45
  text ".print_Scale" at 9680.9,-1440.69 h70
  text ".Application_BuildNumber" at 11186.4,-1440.69 h70
  text "1" at -972.76,-1647.36 h70
  text "2" at 1522.9,-1647.36 h70
  text "3" at 4012.24,-1647.36 h70
  text "4" at 6518.91,-1647.36 h70
  text "5" at 9017.9,-1647.36 h70
  text "6" at 11522.9,-1647.36 h70
M10 Fab Notes:
  drawing of 173 lines, arcs and shapes, not listed
  text "DESIGN INFORMATION" at 10669.42,5972.32 h60
  text "MIN. TRACK WIDTH:" at 10024.86,5840.19 h60
  text "8" at 11121.1,5840.19 h60
  text "MIL" at 11275.86,5840.19 h60
  text "7.874" at 10954.72,5718.5 h60
  text "MIN. CLEARANCE:" at 10024.86,5716.06 h60
  text "MIL" at 11275.86,5716.06 h60
  text "MIN. VIA PAD SIZE:" at 10024.86,5591.94 h60
  text "24" at 11091.11,5591.94 h60
  text "MIL" at 11275.86,5591.94 h60
  text "0.05mm (2MIL)" at 10719.86,5462.04 h60
  text "MINIMUM ANNULAR RING" at 9695.63,5453.82 h60
  text "EXTERNAL" at 11427.86,5453.82 h60
  text "PER" at 9895.63,5343.69 h60
  text "IPC-D-275 CLASS 2 LEVEL C" at 10115.63,5343.69 h60
  text "MIL, HOLES" at 11603.86,5243.21 h60
  text "+/-" at 11211.4,5234.62 h60
  text "+/-" at 12065.4,5234.62 h60
  text "REGISTRATION TOLERANCES:" at 9695.63,5233.56 h60
  text "METAL" at 10895.4,5233.56 h60
  text "5" at 11471.6,5233.56 h60
  text "3" at 12304.6,5233.56 h60
  text "MIL" at 12420.86,5233.56 h60
  text "HOLE SIZE TOLERANCE (UNLESS OTHERWISE SPECIFIED):" at 9695.63,5135.25 h60
  text "+/-" at 12065.4,5132.37 h60
  text "3" at 12304.6,5131.31 h60
  text "MIL" at 12420.86,5131.31 h60
  text "MATERIAL:" at 9620.86,4993.66 h60
  text "FR-4 High Tg" at 10607.3,4865.14 h60
  text "X" at 10462.87,4857.15 h60
  text "FR-4" at 10041.86,4852.63 h60
  text "OTHER" at 11529.86,4852.63 h60
  text "62 MIL (1.6mm) +/-10%" at 10361.96,4709.6 h60
  text "X" at 10241.87,4707.15 h60
  text "THICKNESS:" at 9695.63,4701.38 h60
  text "OTHER" at 11646.86,4701.38 h60
  text "TOLERANCE:" at 9695.63,4563.06 h60
  text "X" at 10543.87,4563.06 h60
  text "ANSI IPC-6012 TYPE 3 CLASS 2" at 10721.88,4563.06 h60
  text "OTHER +/-" at 10721.86,4418.88 h60
  text "BOW & TWIST:" at 9695.63,4273.69 h60
  text "X" at 10543.87,4273.69 h60
  text "ANSI IPC-6012 TYPE 3 CLASS 2" at 10721.88,4273.69 h60
  text "OTHER +/-" at 10721.86,4126.99 h60
  text "DRILLING:" at 9620.86,3996.37 h60
  text "NC_DRILL FILES" at 11381.86,3891.18 h60
  text "REFERENCE:" at 9695.63,3887.25 h60
  text "X" at 10352.87,3887.15 h60
  text "AS SHOWN" at 10530.86,3887.25 h60
  text "X" at 11253.87,3887.25 h60
  text "OTHER" at 11679.86,3744.99 h60
  text "PTH COPPER THICKNESS:" at 9695.31,3741.46 h60
  text "X" at 10834.54,3741.46 h60
  text "20-30 um" at 10962.54,3741.46 h60
  text "BOARD FINISH:" at 9620.86,3593.87 h60
  text "SILKSCREEN:" at 9776.08,3483.74 h60
  text "X" at 10733.87,3483.74 h60
  text "TOP" at 10850.86,3483.74 h60
  text "X" at 11243.87,3483.74 h60
  text "BOTTOM" at 11361.86,3483.74 h60
  text "SILKSCREEN COLOR:" at 9776.08,3328.55 h60
  text "X" at 10732.87,3328.55 h60
  text "WHITE" at 10850.86,3328.55 h60
  text "OTHER" at 11361.86,3328.55 h60
  text "X" at 10863.87,3185.1 h60
  text "GREEN" at 10981.86,3185.1 h60
  text "OTHER" at 11599.86,3185.1 h60
  text "SOLDER RESIST COLOR:" at 9776.08,3178.24 h60
  text "X" at 10863.87,3030.85 h60
  text "MATTE" at 10981.86,3030.85 h60
  text "SEMI-GLOSS" at 11599.4,3030.21 h60
  text "IMMERSION GOLD (ENIG)" at 10681.86,2858.08 h60
  text "ENEPIG" at 12019.4,2850.86 h60
  text "SURFACE FINISH:" at 9620.86,2849.86 h60
  text "X" at 10503.87,2849.86 h60
  text "IMM. TIN/SILVER OR EQUIV" at 9950.4,2712.54 h60
  text "OTHER" at 11381.86,2708.61 h60
  text "ARRAY/PANEL:" at 9620.86,2553.23 h60
  text "CUT AND TRIM PER M1 BOARD OUTLINE" at 10681.86,2545.01 h60
  text "N.C. ROUTE" at 10681.86,2409.04 h60
  text "X" at 11369.87,2409.04 h60
  text "V. SCORE" at 11547.86,2409.04 h60
  text "CERTIFICATION:" at 9620.86,2279.91 h60
  text "MATERIALS AND WORKMANSHIP FOR ALL PCBS" at 10345.86,2279.91 h60
  text "TO MEET OR EXCEED THE REQUIREMENTS OF:" at 10345.86,2185.85 h60
  text "X" at 9983.37,2057.22 h60
  text "ANSI IPC-A-600F CLASS ->" at 10111.36,2057.22 h60
  text "X" at 11759.37,2057.22 h60
  text "2" at 11869.36,2057.22 h60